# Altium PCB interface1.PcbDoc
Units mil, origin at the board's own origin, x right, y up, seen from the top; angles counter-clockwise.
Board outline 1485 x 520 mil, 2 copper layers (Top Layer, Bottom Layer); 5 components, 3 nets, 9 pads, 0 vias.
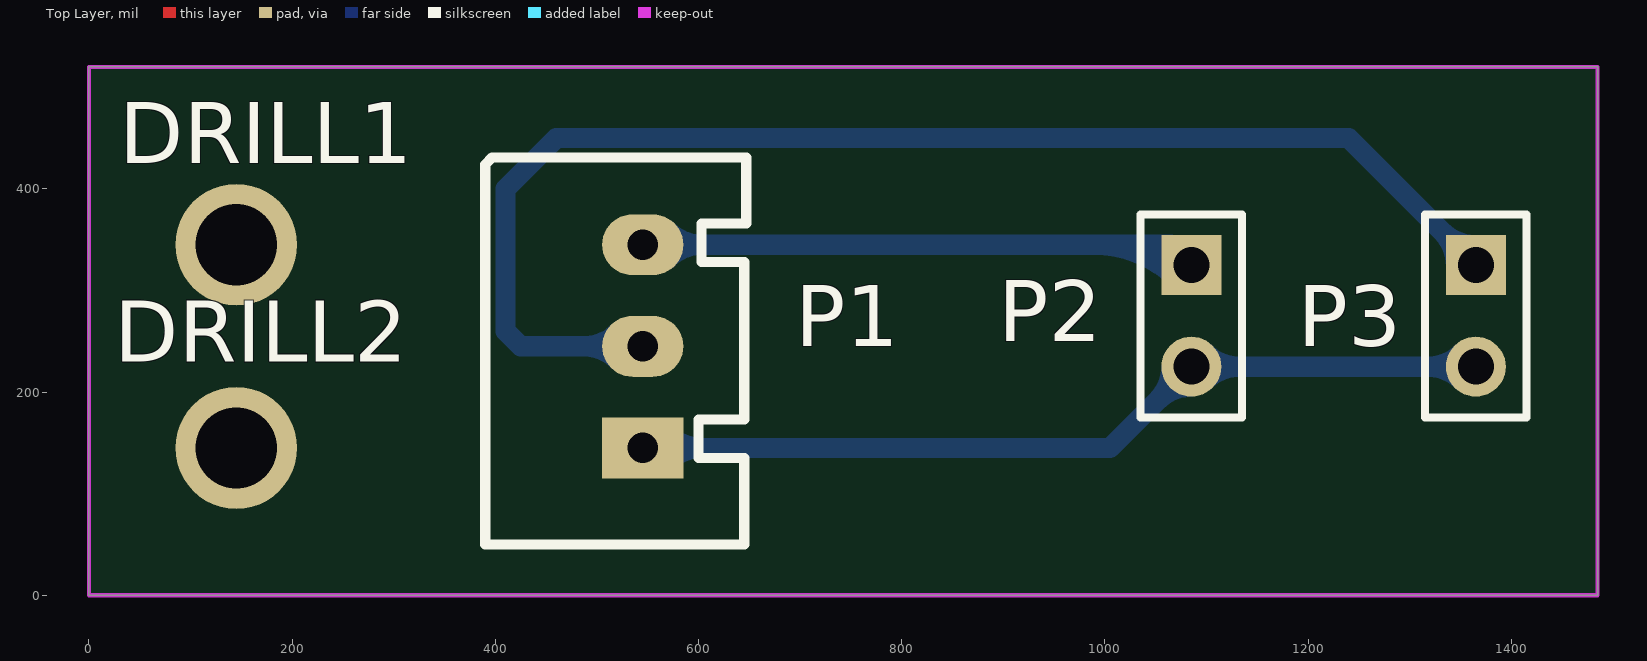
[diagram p0: Top Layer view]
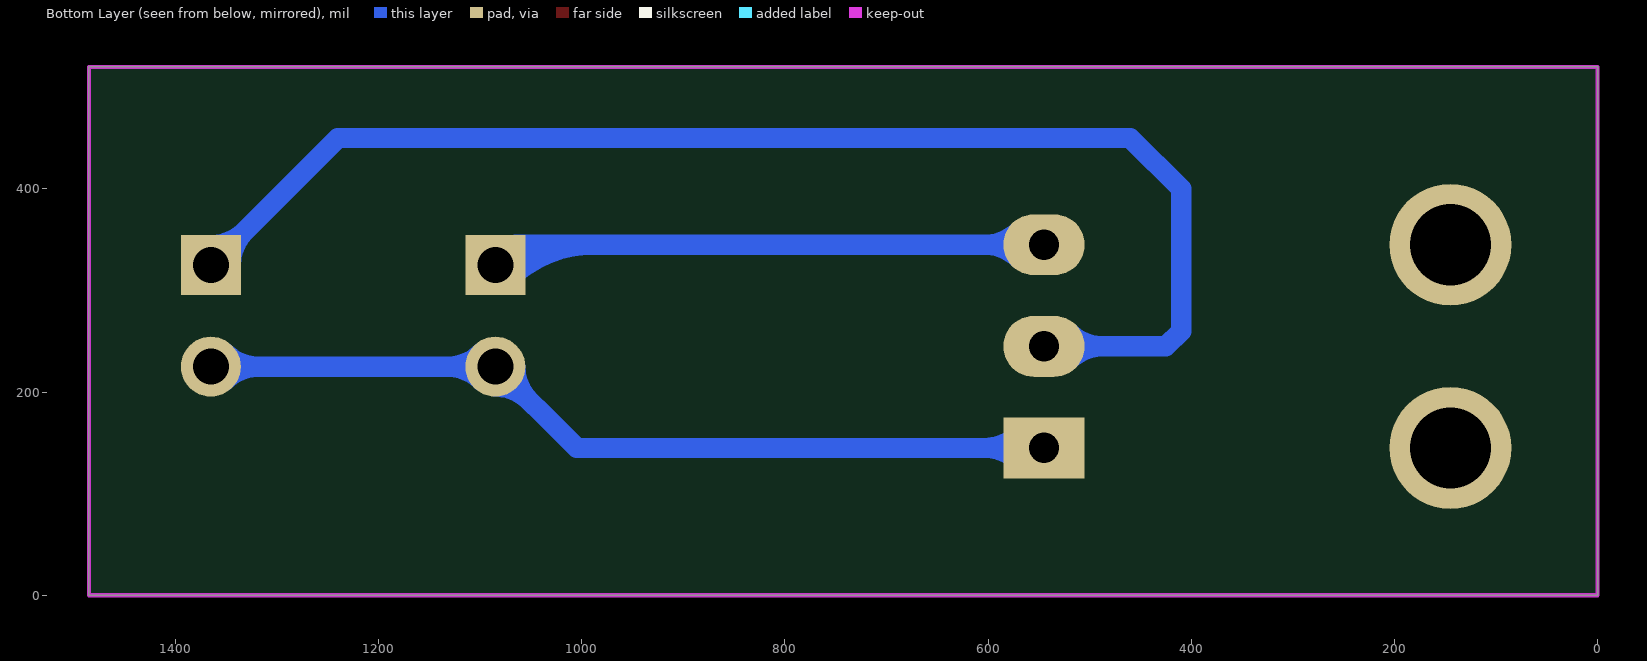
[diagram p1: Bottom Layer view, seen from below]

## Layer stack, top to bottom
Top Layer: signal copper 1.4
Dielectric: dielectric 12.6, FR-4, Dk 4.8
Bottom Layer: signal copper 1.4

## Board outline
0,520 0,0 1485,0 1485,520

## Design rules (kind name [scope] priority, off if disabled: settings)
Clearance [All] p1: gap=10
PolygonConnect [All] p1: connectstyle=Relief reliefconductorwidth=10 reliefentries=4 polygonreliefangle="90 Angle"
RoutingVias [All] p1: holewidth=28 width=50 viastyle="Through Hole" minholewidth=28 minwidth=50 maxholewidth=28 maxwidth=50
SilkscreenOverComponentPads [All] p1: minsilkscreentomaskgap=10
SolderMaskExpansion [All] p1: expansion=4
Width [All] p1: maxlimit=20 minlimit=10 preferedwidth=10
27 further rules are at their usual default settings.

## Components (designator, comment, footprint, x,y, rotation, side; value= is the part's Value field where it differs from the comment)
DRILL1 "DRILL" DRILL_2MM 145,345 r90 top
DRILL2 "DRILL" DRILL_2MM 145,145 r90 top
P1 "Header 3X1" HDR3X1 545,245 r90 top
P2 "Header 2" HDR1X2 1085,325 r270 top
P3 "Header 2" HDR1X2 1365,325 r270 top

## Footprints (in the part's own frame and the unit in brackets; to place one, negate y for a bottom-side part, rotate by r counter-clockwise, add the part's x,y. Pads: shape width x height; smd on the part's side, far side on the other; paste and mask are expansions set on the pad)
DRILL_2MM [mil]
  round 120 hole 80: 1(0,0)
HDR1X2 [mm] "Connector; Header; 2 Position"
  rect 1.5x1.5 hole 0.9: 1(0,0)
  round 1.5 hole 0.9: 2(2.54,0)
  silkscreen extent -1.27,-1.27 3.81,1.27
HDR3X1 [mil]
  rect 60x80 hole 30: 1(-100,0)
  oval 60x80 hole 30: 2(0,0) 3(100,0)
  silkscreen extent -195,-102 186,155

## Part data
P1: "Header 3X1,3-Pin"
P2 P3: "Header, 2-Pin"

## Nets (pads, with @x,y where several pads share a name; then routed paths per layer and width w, separated by ;. In a path a pad name is that pad's centre, name@x,y a point inside that pad or via, vN(x,y) a via of type N, cw(c..) or ccw(c..) an arc to the next point about the centre after c; other vN are vias at no path point)
GND: P1.1 P2.2 P3.2 | length 1151.1
  Bottom Layer w20: P1.1 1005,145 P2.2 P3.2 ; P1.1@569.14,130.86 cw(c603.28,96.72) 603.28,145 cw(c603.28,193.28) P1.1@569.14,159.14 ; P2.2@1065.47,225 cw(c1018.33,225) 1051.66,191.66 cw(c1085,158.33) P2.2@1085,205.47 ; P2.2@1098.81,211.19 cw(c1132.14,177.86) 1132.14,225 cw(c1132.14,272.14) P2.2@1098.81,238.81 ; P3.2@1351.19,211.19 ccw(c1317.86,177.86) 1317.86,225 ccw(c1317.86,272.14) P3.2@1351.19,238.81
NODE3: P1.2 P3.1 | length 1458.6
  Bottom Layer w20: P1.2@520.86,230.86 ccw(c486.72,196.72) 486.72,245 ccw(c486.72,293.28) P1.2@520.86,259.14 ; P1.2 425,245 410,260 410,400 460,450 1240,450 P3.1 ; P3.1@1345.47,325 ccw(c1298.33,325) 1331.66,358.34 ccw(c1365,391.67) P3.1@1365,344.53
VCC: P1.3 P2.1 | length 767.5
  Bottom Layer w20: P1.3 1065,345 P2.1 ; P1.3@569.14,330.86 cw(c603.28,296.72) 603.28,345 cw(c603.28,393.28) P1.3@569.14,359.14 ; 989.57,345 cw(c989.57,229.57) P2.1@1071.19,311.19 ; 1037.86,345 cw(c1037.86,277.86) P2.1@1085.33,325.33
pads on no net: DRILL1.1 DRILL2.1

## Keep-outs
Keep-Out Layer:
  the board outline again, w4

## Silkscreen, mask and mechanical layers (free items; w line width, h text height)
Mechanical 1:
  the board outline again, w4